# Altium PCB PCB2.PcbDoc
Units mil, origin at the board's own origin, x right, y up, seen from the top; angles counter-clockwise.
Board outline 6000 x 4000 mil, 2 copper layers (Top Layer, Bottom Layer); 12 components, 21 nets, 56 pads, 0 vias.
Unrouted connection lines stored in the file: 29.
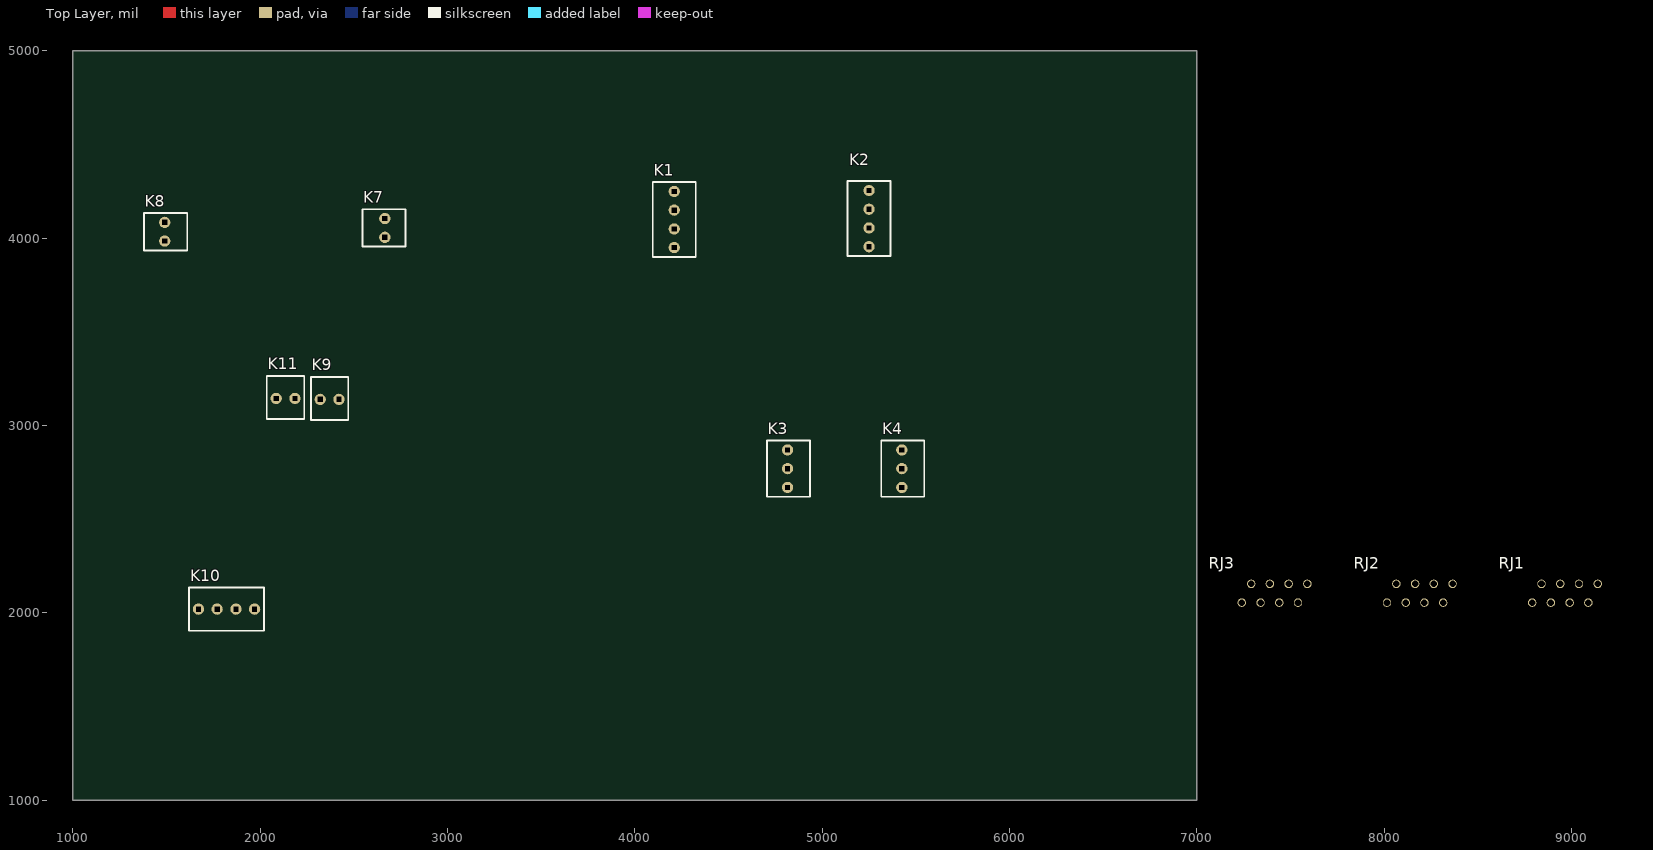
[diagram p0: Top Layer view]
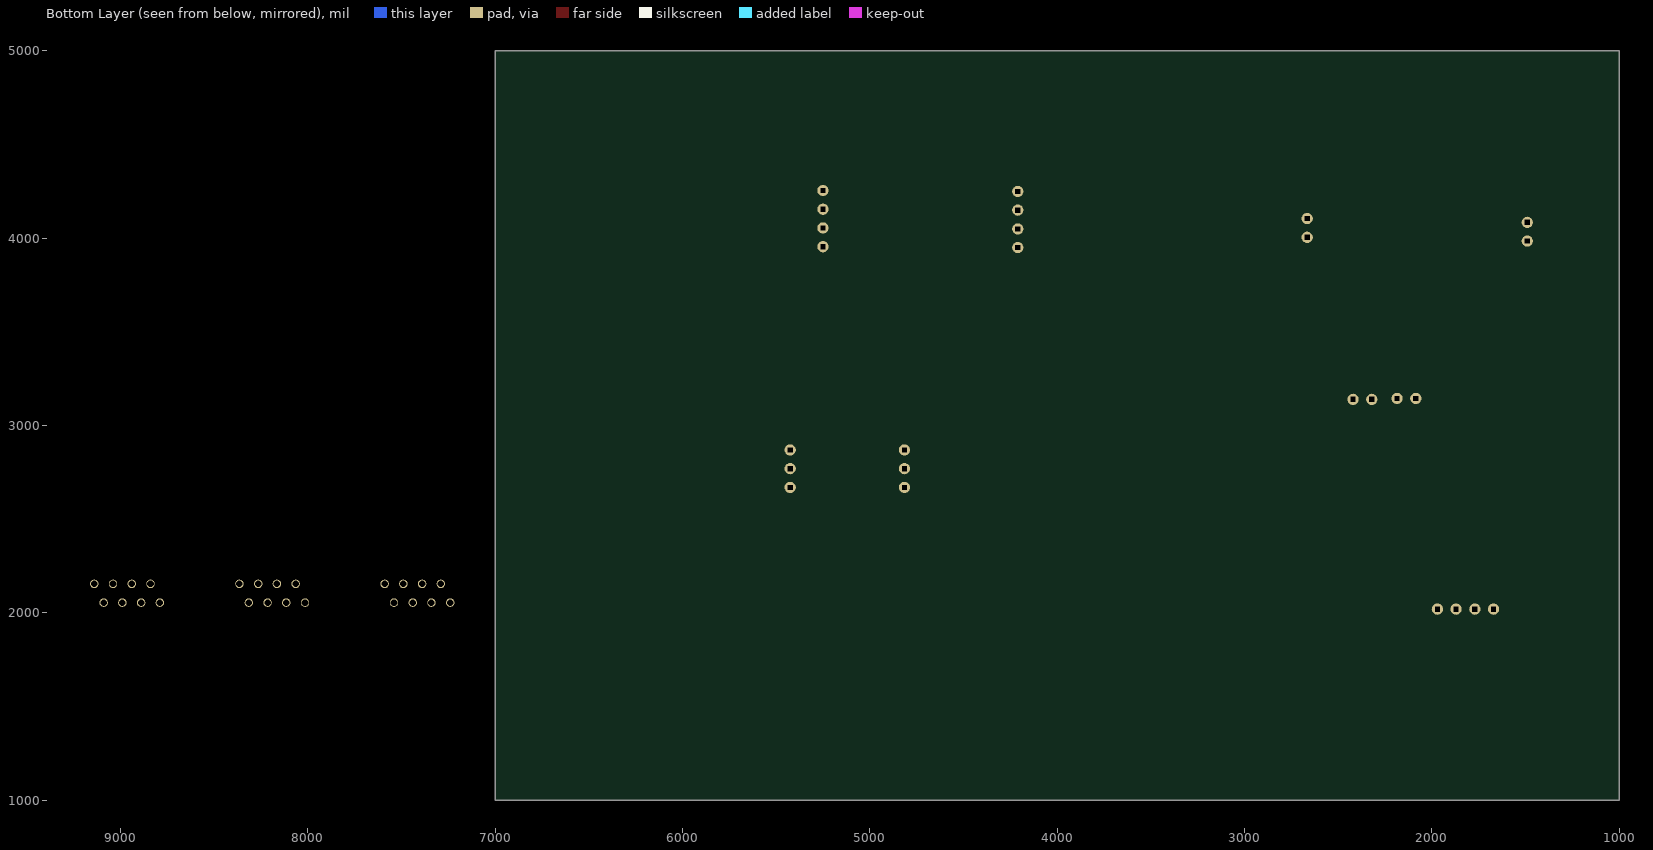
[diagram p1: Bottom Layer view, seen from below]

## Layer stack, top to bottom
Top Solder: solder mask 0.4, Solder Resist, Dk 3.5
Top Layer: signal copper 1.4
Dielectric 1: dielectric 12.6, FR-4, Dk 4.8
Bottom Layer: signal copper 1.4
Bottom Solder: solder mask 0.4, Solder Resist, Dk 3.5

## Board outline
1000,1000 7000,1000 7000,5000 1000,5000

## Design rules (kind name [scope] priority, off if disabled: settings)
Clearance [All] p1: gap=10 ignorepadtopadclearanceinfootprint=FALSE except(0: Arc-Hole Track-Hole SMDPad-Hole THPad-Hole Via-Hole Fill-Hole Poly-Hole Region-Hole Text-Hole)
PolygonConnect [All] p1: connectstyle=Relief reliefconductorwidth=10 reliefentries=4 polygonreliefangle="90 Angle" airgapwidth=10
RoomDefinition TesteRJ45 [InComponentClass('TesteRJ45')] p1: confinementstyle=ConfineIn formatcopy=TRUE lockcomponents=FALSE outline 0,0 2000,0 2000,1000 0,1000
RoomDefinition TesteKK [InComponentClass('TesteKK')] p2: confinementstyle=ConfineIn formatcopy=TRUE lockcomponents=FALSE outline 4575,1665 5120,1665 5120,1985 4575,1985
RoutingVias [All] p1: holewidth=28 width=50 viastyle="Through Hole" minholewidth=28 minwidth=50 maxholewidth=28 maxwidth=50
SolderMaskExpansion [All] p1: expansion=4
Width [All] p1: maxlimit=10 minlimit=10 preferedwidth=10
30 further rules are at their usual default settings.

## Classes and differential pairs
component class TesteRJ45: K5 K6 RJ1 RJ2 RJ3
component class TesteKK: K1 K2 K3 K4 K7 K8 K9 K10 K11

## Components (designator, comment, footprint, x,y, rotation, side; value= is the part's Value field where it differs from the comment)
K1 "KK4" 4-vias 4210,3950 r180 top
K2 "KK4" 4-vias 5250,4255 r0 top
K3 "KK3" 3-vias#1 4815,2770 r0 top
K4 "KK3" 3-vias#2 5425,2770 r0 top
K7 "KK2" 2-vias 2665,4055 r180 top
K8 "KK2" 2-vias 1490,4035 r0 top
K9 "KK2" 2-vias 2370,3140 r90 top
K10 "KK4" 4-vias 1970,2020 r270 top
K11 "KK2" 2-vias 2135,3145 r90 top
RJ1 "RJ45" RJ45_Simples 8740,1805 r0 top
RJ2 "RJ45" RJ45_Simples 7965,1805 r0 top
RJ3 "RJ45" RJ45_Simples 7190,1805 r0 top

## Footprints (in the part's own frame and the unit in brackets; to place one, negate y for a bottom-side part, rotate by r counter-clockwise, add the part's x,y. Pads: shape width x height; smd on the part's side, far side on the other; paste and mask are expansions set on the pad)
2-vias [mil]
  round 60 hole 25.2 square: 1(0,50) 2(0,-50)
  silkscreen extent -110,-100 120,100, body extent -113,-100 117,100, height 461
3-vias#1 [mil]
  round 60 hole 25.2 square: 1(0,100) 2(0,0) 3(0,-100)
  silkscreen extent -110,-150 120,150, body extent -113,-150 117,150, height 460
3-vias#2 [mil]
  round 60 hole 25.2 square: 1(0,-100) 2(0,0) 3(0,100)
  silkscreen extent -110,-150 120,150, body extent -113,-150 117,150, height 460
4-vias [mil]
  round 60 hole 25.2 square: 1(0,0) 2(0,-100) 3(0,-200) 4(0,-300)
  silkscreen extent -115,-350 115,50, body extent -115,-350 115,50, height 460
RJ45_Simples [mil] "Sem led nessas porra - 8P8C"
  round 0 hole 128: 0(0,0) 0(450,0)
  round 45 hole 35: 1(50,250) 2(100,350) 3(150,250) 4(200,350) 5(250,250) 6(300,350) 7(350,250) 8(400,350)
  body extent -133,-260 583,395, height 650

## Part data
K1 K2 K10: library part KK4Vias, ComponentLink1Description=Fabricante, ComponentLink1URL=https://www.molex.com/molex/products/family?key=kk_254_rpc_connector_system&channel=products&chanName=family&pageTitle=Introduction&parentKey=kk_interconnect_solutions
K3 K4: library part KK3Vias
K7 K8 K9 K11: library part KK2Vias

## Nets (pads, with @x,y where several pads share a name; then routed paths per layer and width w, separated by ;. In a path a pad name is that pad's centre, name@x,y a point inside that pad or via, vN(x,y) a via of type N, cw(c..) or ccw(c..) an arc to the next point about the centre after c; other vN are vias at no path point)
NetK1_1: K1.1 K2.4
NetK1_2: K1.2 K2.3
NetK1_3: K1.3 K2.2
NetK1_4: K1.4 K2.1
NetK3_1: K3.1 K4.3
NetK3_2: K3.2 K4.2
NetK3_3: K3.3 K4.1
NetK7_1: K7.1 K8.2
NetK7_2: K7.2 K8.1
NetK9_1: K9.1 K10.2
NetK9_2: K9.2 K10.1
NetK10_3: K10.3 K11.2
NetK10_4: K10.4 K11.1
NetRJ1_1: RJ1.1 RJ2.1 RJ3.8
NetRJ1_2: RJ1.2 RJ2.2 RJ3.7
NetRJ1_3: RJ1.3 RJ2.3 RJ3.6
NetRJ1_4: RJ1.4 RJ2.4 RJ3.5
NetRJ1_5: RJ1.5 RJ2.5 RJ3.4
NetRJ1_6: RJ1.6 RJ2.6 RJ3.3
NetRJ1_7: RJ1.7 RJ2.7 RJ3.2
NetRJ1_8: RJ1.8 RJ2.8 RJ3.1
pads on no net: RJ1.0 RJ2.0 RJ3.0